# Altium PCB DoorController_DM-045.PcbDoc
Units mm, origin at the board's own origin, x right, y up, seen from the top; angles counter-clockwise.
Board outline 101.5 x 68.5 mm, 2 copper layers (Top Layer, Bottom Layer); 80 components, 62 nets, 270 pads, 53 vias.
Unrouted connection lines stored in the file: 54.
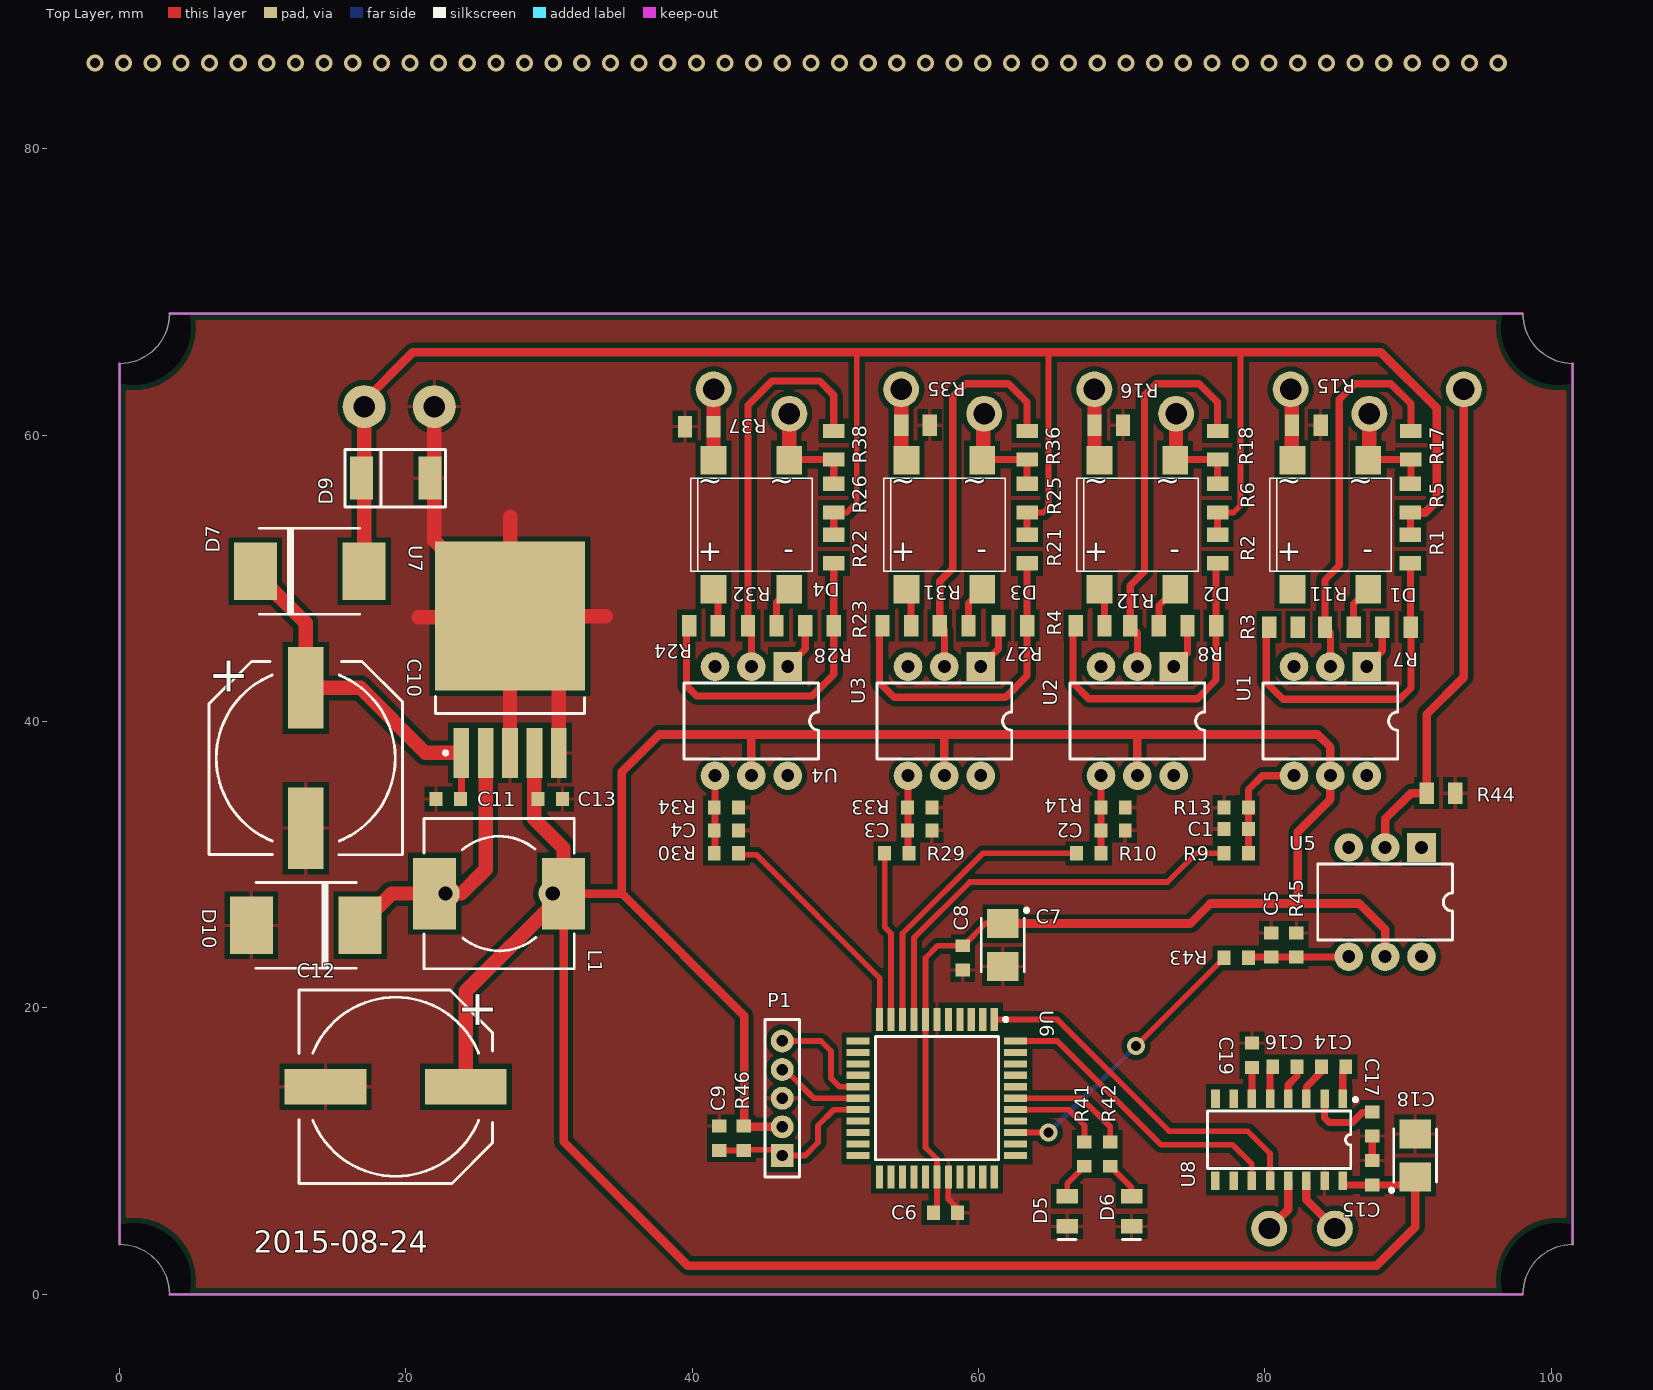
[diagram p0: Top Layer view]
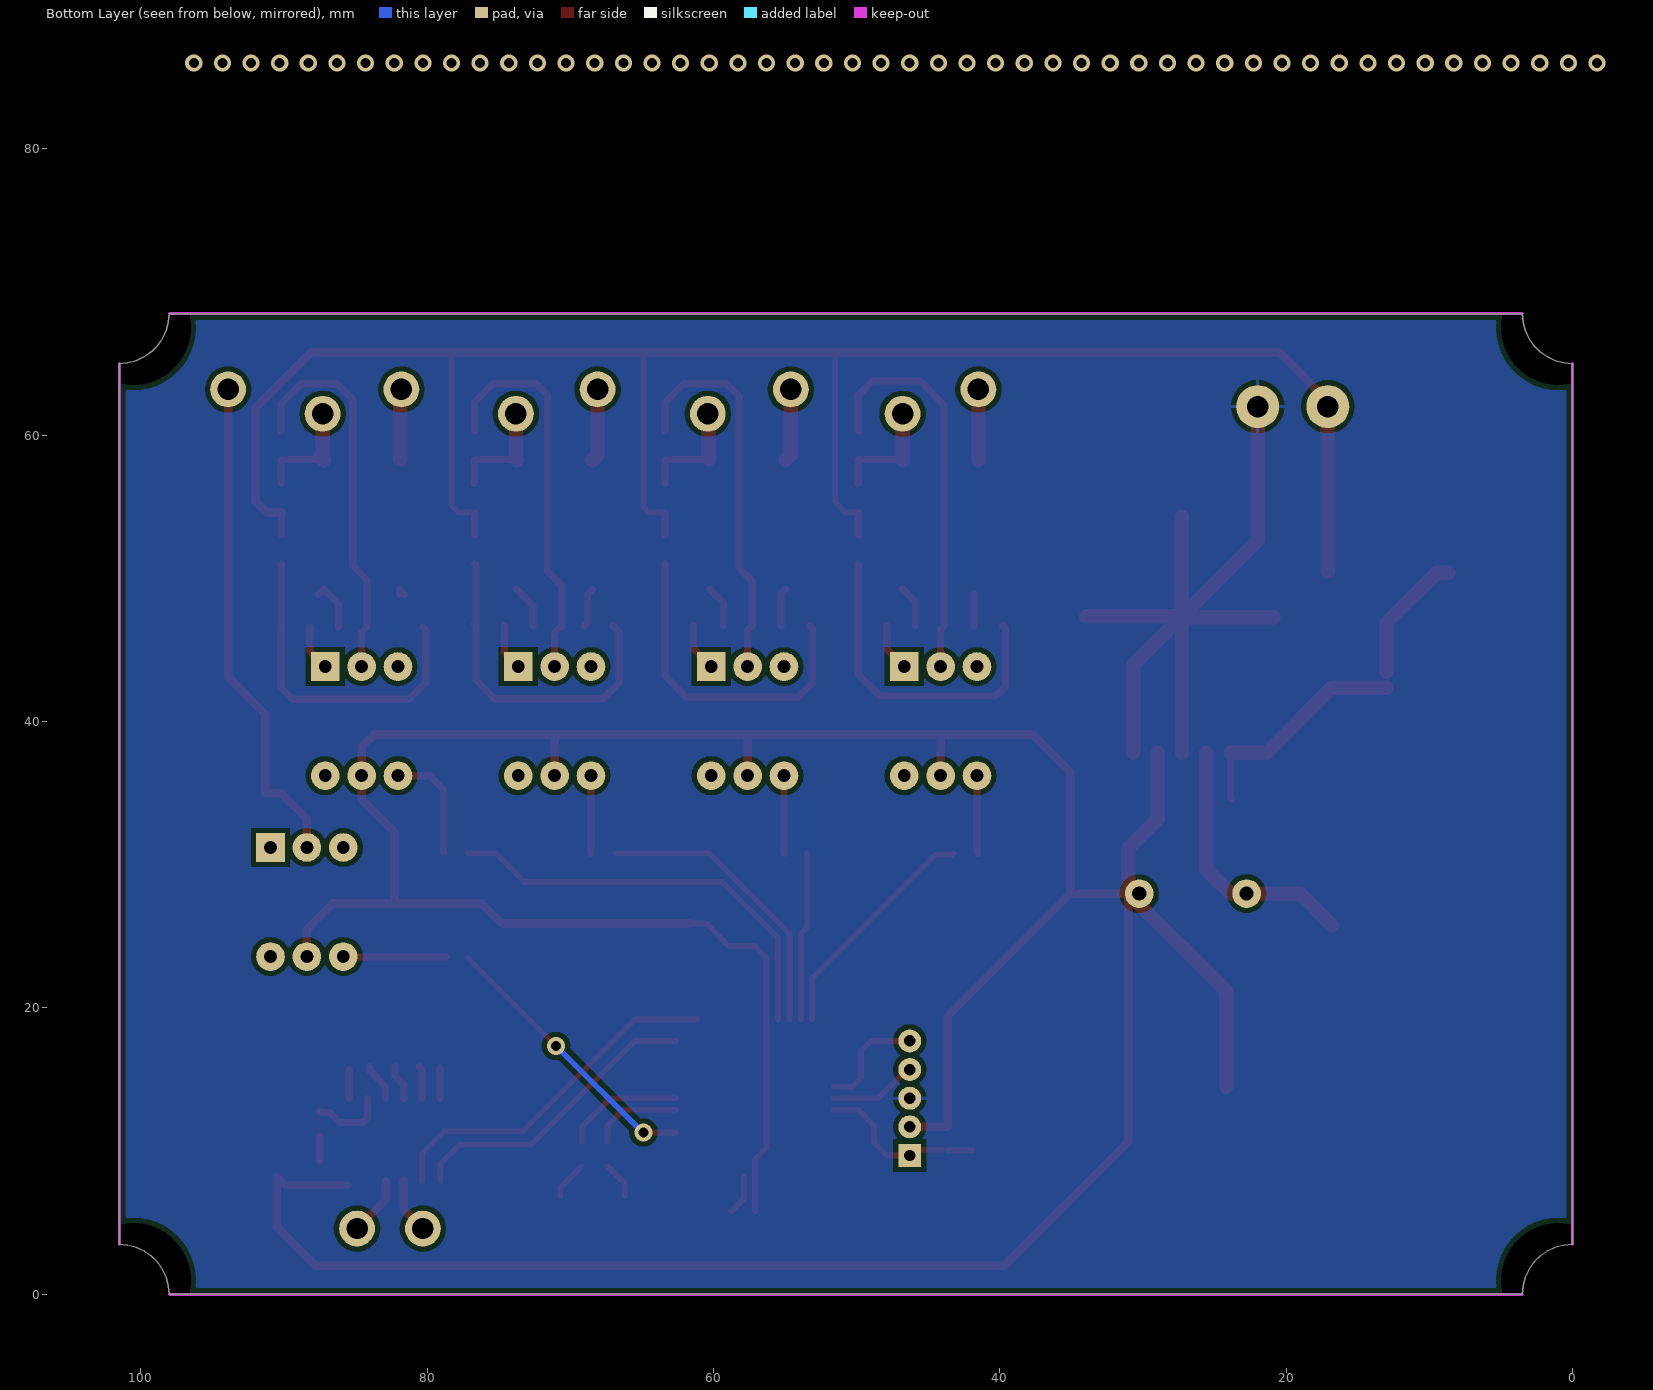
[diagram p1: Bottom Layer view, seen from below]
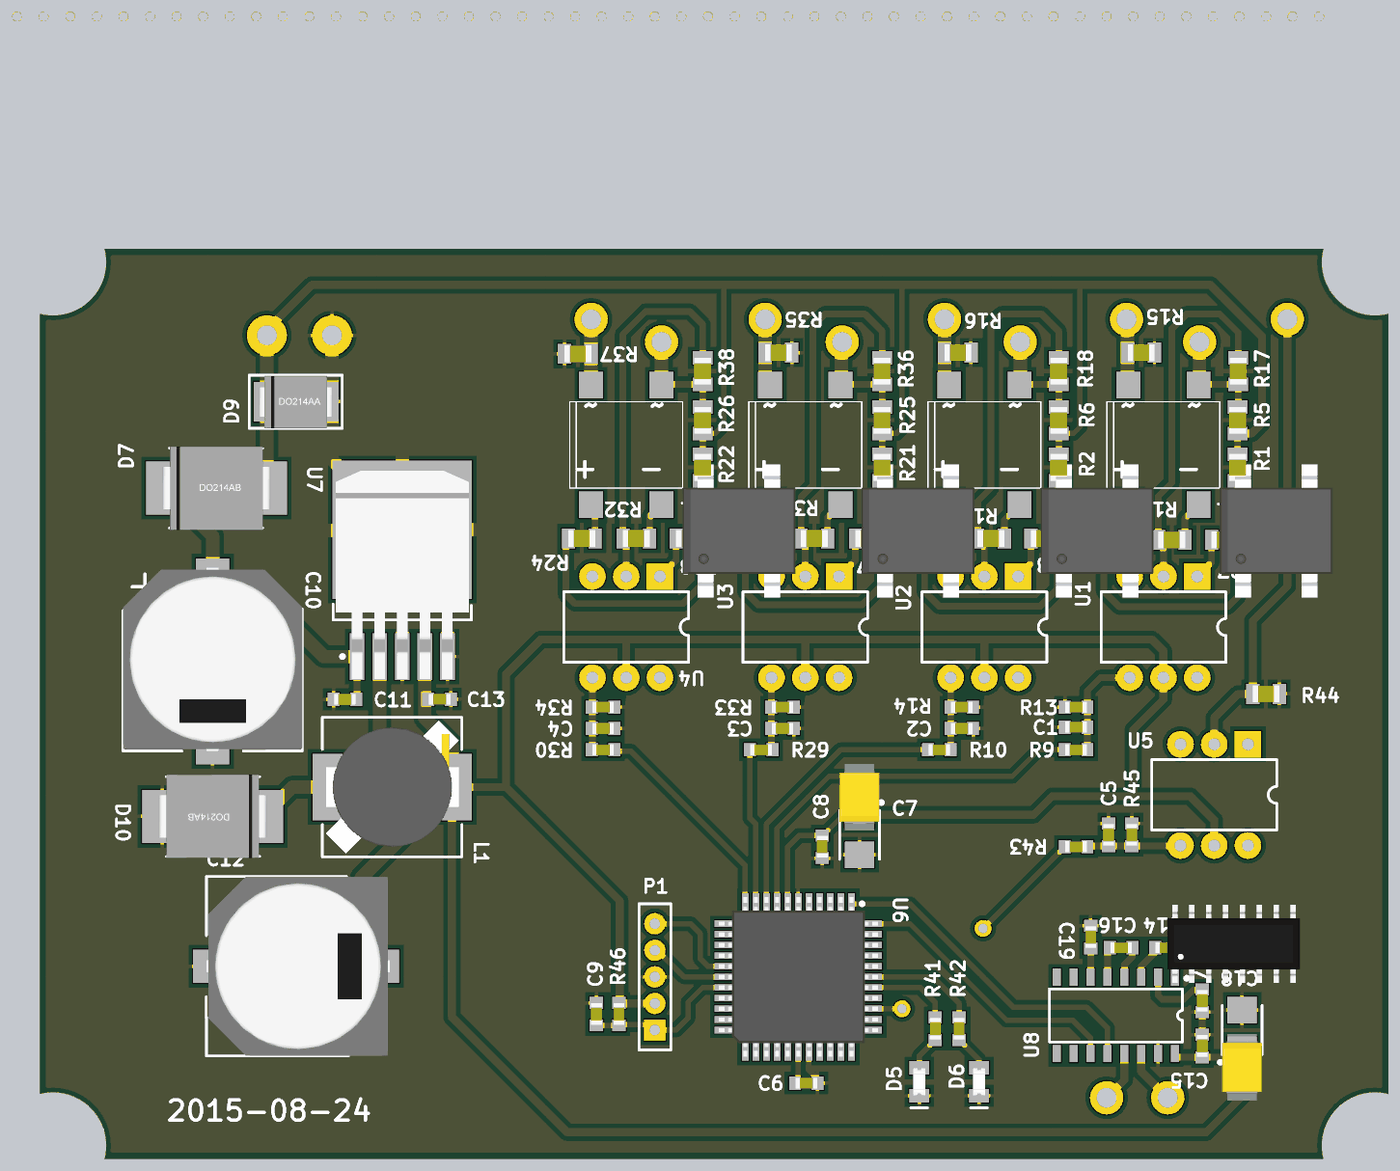
[diagram p2: 3D render of the assembled board from above, using the file's embedded part models]

## Layer stack, top to bottom
Top Layer: signal copper 0.0356
Dielectric: dielectric 0.32, FR-4, Dk 4.8
Bottom Layer: signal copper 0.0356

## Board outline
98.018,0.001 98.071,0.609 98.229,1.198 98.487,1.751 98.837,2.251 99.268,2.682 99.768,3.032 100.321,3.29 100.91,3.448 101.518,3.501 101.518,65.001 100.91,65.054 100.321,65.212 99.768,65.47 99.268,65.82 98.837,66.251 98.487,66.751 98.229,67.304 98.071,67.893 98.018,68.501 3.518,68.501 3.465,67.893 3.307,67.304 3.049,66.751 2.699,66.251 2.268,65.82 1.768,65.47 1.215,65.212 0.626,65.054 0.018,65.001 0.018,3.501 0.626,3.448 1.215,3.29 1.768,3.032 2.268,2.682 2.699,2.251 3.049,1.751 3.307,1.198 3.465,0.609 3.518,0.001

## Design rules (kind name [scope] priority, off if disabled: settings)
Clearance [All] p1: gap=0.35
PolygonConnect [All] p1: connectstyle=Relief reliefconductorwidth=0.254 reliefentries=4 polygonreliefangle="90 Angle"
RoutingVias [All] p1: holewidth=0.6 width=0.8 viastyle="Through Hole" minholewidth=0.6 minwidth=1 maxholewidth=0.711 maxwidth=1.5
SilkscreenOverComponentPads [All] p1: minsilkscreentomaskgap=0.254
SolderMaskExpansion [All] p1: expansion=0.102
TestPointUsage [All] p1: valid=0 allowmultiple=FALSE
Testpoint [All] p1: side=15 testpointundercomponent=TRUE minsize=1.016 maxsize=2.54 preferedsize=1.524 minholesize=0 maxholesize=1.016 preferedholesize=0.813 testpointgrid=0.025 style=1023 order=0123456789
Width [All] p1: maxlimit=1.5 minlimit=0.3 preferedwidth=0.4
23 further rules are at their usual default settings.

## Classes and differential pairs
component class USART: C14 C15 C16 C17 C18 C19 U8
component class POWER: C10 C11 C12 C13 D7 D9 D10 L1 U7
component class Main: C6 C7 C8 C9 P1 R46 U6
component class IO: C1 C2 C3 C4 C5 D1 D2 D3 D4 D5 D6 R1 R2 R3 R4 R5 R6 R7 R8 R9 R10 R11 R12 R13 R14 R15 R16 R17 R18 R21 R22 R23 R24 R25 R26 R27 R28 R29 R30 R31 R32 R33 R34 R35 R36 R37 R38 R41 R42 R43 R44 R45 U1 U2 U3 U4 U5

## Components (designator, comment, footprint, x,y, rotation, side; value= is the part's Value field where it differs from the comment)
C1 "Cap" 3-0603_L 78,32.5 r180 top
C2 "Cap" 3-0603_L 69.4,32.4 r0 top
C3 "Cap" 3-0603_L 55.9,32.4 r0 top
C4 "Cap" 3-0603_L 42.4,32.4 r0 top
C5 "Cap" 3-0603_L 80.45,24.4 r90 top
C6 "Cap" 3-0603_L 57.7,5.7 r0 top
C7 "CAP-Tantal" 3528 61.7,24.4 r270 top
C8 "Cap" 3-0603_L 58.9,23.5 r270 top
C9 "Cap" 3-0603_L 41.9,10.9 r90 top
C10 "Cap Pol1" "CAP Size H13= 12.5x13.8mm" 13.017,37.458 r0 top
C11 "Cap" 3-0603_L 22.969,34.594 r0 top
C12 "Cap Pol1" "CAP Size H13= 12.5x13.8mm" 19.3,14.5 r270 top
C13 "Cap" 3-0603_L 30.1,34.6 r180 top
C14 "Cap" 3-0603_L 84.8,15.9 r180 top
C15 "Cap" 3-0603_L 87.5,8.5 r270 top
C16 "Cap" 3-0603_L 81.4,15.9 r180 top
C17 "Cap" 3-0603_L 87.5,11.9 r90 top
C18 "CAP-Tantal" 3528 90.5,9.7 r90 top
C19 "Cap" 3-0603_L 79.1,16.7 r270 top
D1 "DI1010S" DF-S 84.579,53.751 r180 top
D2 "DI1010S" DF-S 71.1,53.751 r180 top
D3 "DI1010S" DF-S 57.621,53.751 r180 top
D4 "DI1010S" DF-S 44.142,53.751 r180 top
D5 "LED Kırmızı" "6-0805 - LED" 66.2,5.8 r270 top
D6 "LED Yesil" "6-0805 - LED" 70.7,5.8 r270 top
D7 "MBRS340T3G" "CASE 403-03 ISSUE E" 13.3,50.5 r180 top
D9 "TVS SMAJ48CA" "DO214 AA" 19.3,57 r180 top
D10 "MBRS340T3G" "CASE 403-03 ISSUE E" 13.017,25.774 r0 top
L1 "Inductor" EB-221M18G01 26.525,27.99 r90 top
P1 "Header 2mm 5pin" "Header 2mm 5Pin" 46.3,9.7 r90 top
R1 "Res1" 6-0805_M 90.167,52.051 r90 top
R2 "Res1" 6-0805_M 76.7,52.051 r90 top
R3 "Res1" 6-0805_M 81.3,46.6 r0 top
R4 "Res1" 6-0805_M 67.8,46.7 r0 top
R5 "Res1" 6-0805_M 90.167,55.607 r270 top
R6 "Res1" 6-0805_M 76.7,55.607 r270 top
R7 "Res1" 6-0805_M 89.2,46.6 r180 top
R8 "Res1" 6-0805_M 75.6,46.7 r180 top
R9 "Res1" 3-0603_L 78,30.8 r180 top
R10 "Res1" 3-0603_L 67.7,30.8 r180 top
R11 "Res1" 6-0805_M 85.2,46.6 r0 top
R12 "Res1" 6-0805_M 71.6,46.7 r0 top
R13 "Res1" 3-0603_L 78,34 r0 top
R14 "Res1" 3-0603_L 69.4,34 r180 top
R15 "Res1" 6-0805_M 82.9,60.7 r180 top
R16 "Res1" 6-0805_M 69.1,60.7 r180 top
R17 "Res1" 6-0805_M 90.2,59.3 r270 top
R18 "Res1" 6-0805_M 76.7,59.3 r270 top
R21 "Res1" 6-0805_M 63.4,52.051 r90 top
R22 "Res1" 6-0805_M 49.9,52.051 r90 top
R23 "Res1" 6-0805_M 54.3,46.7 r0 top
R24 "Res1" 6-0805_M 40.8,46.7 r0 top
R25 "Res1" 6-0805_M 63.4,55.607 r270 top
R26 "Res1" 6-0805_M 49.9,55.607 r270 top
R27 "Res1" 6-0805_M 62.4,46.7 r180 top
R28 "Res1" 6-0805_M 48.9,46.7 r180 top
R29 "Res1" 3-0603_L 54.3,30.8 r180 top
R30 "Res1" 3-0603_L 42.4,30.8 r0 top
R31 "Res1" 6-0805_M 58.3,46.7 r0 top
R32 "Res1" 6-0805_M 44.9,46.7 r0 top
R33 "Res1" 3-0603_L 55.9,34 r180 top
R34 "Res1" 3-0603_L 42.4,34 r180 top
R35 "Res1" 6-0805_M 55.6,60.7 r180 top
R36 "Res1" 6-0805_M 63.4,59.3 r270 top
R37 "Res1" 6-0805_M 40.5,60.6 r0 top
R38 "Res1" 6-0805_M 49.9,59.3 r270 top
R41 "Res1" 3-0603_L 67.4,9.8 r90 top
R42 "Res1" 3-0603_L 69.2,9.8 r90 top
R43 "Res1" 3-0603_L 78,23.5 r180 top
R44 "Res1" 6-0805_M 92.3,35 r180 top
R45 "Res1" 3-0603_L 82.2,24.4 r270 top
R46 "Res1" 3-0603_L 43.6,10.9 r90 top
U1 "4N25" DIP-6 84.579,40.035 r180 top
U2 "4N25" DIP-6 71.1,40.035 r180 top
U3 "4N25" DIP-6 57.621,40.035 r180 top
U4 "4N25" DIP-6 44.142,40.035 r180 top
U5 "4N25" DIP-6 88.4,27.4 r180 top
U6 "PIC16F887" TQFP-44 57.1,13.7 r270 top
U7 "LM2576S-5.0" TS5B_M 27.287,43.865 r90 top
U8 "MAX232ID" "SOIC16 - big" 81,10.8 r180 top

## Footprints (in the part's own frame and the unit in brackets; to place one, negate y for a bottom-side part, rotate by r counter-clockwise, add the part's x,y. Pads: shape width x height; smd on the part's side, far side on the other; paste and mask are expansions set on the pad)
3-0603_L [mm] "Chip Resistor; Body 1.6 x 0.9 mm (LxW typ)"
  rect 0.9x1 smd: 1(-0.85,0) 2(0.85,0)
  body extent -0.81,-0.41 0.81,0.41, height 0.46
"6-0805 - LED" [mm] "Chip LED"
  rect 1x1.5 smd: 1(-1.05,0) 2(1.05,0)
  silkscreen extent 1.96,-0.63 1.96,0.62, body extent -1.03,-0.45 1.03,0.46, height 0.85
6-0805_M [mm] "Chip Resistor; Body 2 x 1.2 mm (LxW typ)"
  rect 1x1.5 smd: 1(-1,0) 2(1,0)
  body extent -1.01,-0.63 1.01,0.64, height 0.61
3528 [mm] "Capacitor, SM Tantalum; Body 3.5 x 2.8 mm (LxW typ)"
  rect 2x2.2 smd: 1(-1.5,0) 2(1.5,0)
  silkscreen extent -2.55,-1.5 1.85,1.78, body extent -2.5,-1.5 2.5,1.5, height 2.11
"CAP Size H13= 12.5x13.8mm" [mm]
  rect 2.5x5.7 smd: 1(0,4.9) 2(0,-4.9)
  silkscreen extent -6.75,-6.76 6.75,6.75, body extent -6.75,-6.76 6.75,7.04, height 13.5
"CASE 403-03 ISSUE E" [mm] "CASE 403-03 ISSUE E"
  rect 3x4 smd: 1(-3.8,0) 2(3.8,0)
  silkscreen extent -3.48,-3 3.53,3, body extent -4.06,-3.14 4.06,3.16, height 2.67
DF-S [mm]
  rect 1.8x2 smd: 1(-2.65,4.5) 2(-2.65,-4.5) 3(2.65,4.5) 4(2.65,-4.5)
  silkscreen extent -4.25,-3.25 4.25,3.25, body extent -4.24,-5.02 4.26,4.98, height 3.63
DIP-6 [mm] "DIP; 6 Leads; Row Spacing 7.62 mm; Pitch 2.54 mm"
  rect 2x2 hole 0.9: 1(-2.54,-3.81)
  round 2 hole 0.9 unplated: 2(0,-3.81) 3(2.54,-3.81) 4(2.54,3.81) 5(0,3.81)
  round 2 hole 0.9: 6(-2.54,3.81)
  silkscreen extent -4.7,-2.65 4.7,2.65
"DO214 AA" [mm] "DO-214-AA/SMB; 2 C-Bend Leads; Body 5.6 x 3.9 mm, inc. leads (LxW)"
  rect 1.6x3 smd: 1(-2.4,0) 2(2.4,0)
  silkscreen extent -3.48,-2 3.53,2, body extent -2.76,-1.95 2.82,2, height 2.65
EB-221M18G01 [mm]
  rect 5x3 smd: 1(0,4.5) 2(0,-4.5)
  round 2 hole 1: 1(0,3.75) 2(0,-3.75)
  silkscreen extent -5.25,-5.25 5.25,5.25, body extent -5,-5.02 5,4.98, height 4.7
"Header 2mm 5Pin" [mm] "10 pin header"
  rect 1.6x1.6 hole 0.8: 1(0,0)
  round 1.6 hole 0.8: 2(2,0) 3(4,0) 4(6,0) 5(8,0)
  silkscreen extent -1.5,-1.2 9.5,1.2
"SOIC16 - big" [mm]
  rect 0.6x1.3 smd: 1(-4.445,-2.875) 2(-3.175,-2.875) 3(-1.905,-2.875) 4(-0.635,-2.875) 5(0.635,-2.875) 6(1.905,-2.875) 7(3.175,-2.875) 8(4.445,-2.875) 9(4.45,2.875) 10(3.175,2.875) 11(1.905,2.875) 12(0.635,2.875) 13(-0.635,2.875) 14(-1.905,2.875) 15(-3.175,2.875) 16(-4.445,2.875)
  silkscreen extent -5.45,-2.92 5,2, body extent -5,-2.95 4.98,2.95, height 1.45
TQFP-44 [mm]
  rect 1.6x0.5 smd: 1(-5.5,4) 2(-5.5,3.2) 3(-5.5,2.4) 4(-5.5,1.6) 5(-5.5,0.8) 6(-5.5,0) 7(-5.5,-0.8) 8(-5.5,-1.6) 9(-5.5,-2.4) 10(-5.5,-3.2) 11(-5.5,-4) 23(5.5,-4) 24(5.5,-3.2) 25(5.5,-2.4) 26(5.5,-1.6) 27(5.5,-0.8) 28(5.5,0) 29(5.5,0.8) 30(5.5,1.6) 31(5.5,2.4) 32(5.5,3.2) 33(5.5,4)
  rect 0.5x1.6 smd: 12(-4,-5.5) 13(-3.2,-5.5) 14(-2.4,-5.5) 15(-1.6,-5.5) 16(-0.8,-5.5) 17(0,-5.5) 18(0.8,-5.5) 19(1.6,-5.5) 20(2.4,-5.5) 21(3.2,-5.5) 22(4,-5.5) 34(4,5.5) 35(3.2,5.5) 36(2.4,5.5) 37(1.6,5.5) 38(0.8,5.5) 39(0,5.5) 40(-0.8,5.5) 41(-1.6,5.5) 42(-2.4,5.5) 43(-3.2,5.5) 44(-4,5.5)
  silkscreen extent -5.62,-4.3 4.3,4.93, body extent -6,-6 6,6, height 1.1
TS5B_M [mm] "D2-PAK, 6-Leads, Body 8.6x10.2mm, Pitch 1.7mm, Lead Span 14.1mm, IPC Low Density"
  rect 3.5x1.1 smd: 1(-6.05,3.4) 2(-6.05,1.7) 3(-6.05,0) 4(-6.05,-1.7) 5(-6.05,-3.4)
  rect 10.4x10.5 smd: 6(3.5,0)
  silkscreen extent -6.17,-5.2 -2.11,5.2, body extent -7.73,-5 7.94,5, height 4.78

## Part data
C1 C2 C3 C4 C5 C6 C8 C9 C11 C13 C14 C15 C16 C17 C19: "Capacitor"
C7 C18: "Tantamount Military, Surface Mount MIL-PRF-55365/8 Qualified Solid Tantalum Chip Capacitor: 6.8uF, 20% Tolerance, 6 WVDC @ +85°C, Surge = 8V"
C10 C12: "Polarized Capacitor (Radial)"
D1 D2 D3 D4: "Full Wave Diode Bridge"
D5 D6: library part LED, "Typical INFRARED GaAs LED"
D7 D10: "3 Amp Shotky Rectifier"
P1: "Header 2mm , 5-Pin"
R1 R2 R3 R4 R5 R6 R7 R8 R9 R10 R11 R12 R13 R14 R15 R16 R17 R18 R21 R22 R23 R24 R25 R26 R27 R28 R29 R30 R31 R32 R33 R34 R35 R36 R37 R38 R41 R42 R43 R44 R45 R46: "Resistor"
U6: "EPROM-Based 8-Bit CMOS Microcontroller"
U7: "SIMPLE SWITCHER; 3A Step-Down Voltage Regulator"
U8: "5V, Low-Power, up to 1Mbps, True RS-232 Transceiver Using Four 0.1µF External Capacitor"

## Free pads (board coordinates)
  round 3 hole 1.5: 1(17.1,62) 1(22,62)
  round 2.5 hole 1.5: 1(41.5,63.2) 1(46.8,61.5) 1(54.6,63.2) 1(60.4,61.5) 1(68.1,63.2) 1(73.8,61.5) 1(80.3,4.6) 1(81.8,63.2) 1(84.9,4.6) 1(87.3,61.5) 1(93.9,63.2)
  round 7 hole 8: 3(1,1) 3(1,67.5) 3(100.5,1) 3(100.5,67.5)

## Via types
v1: diameter 1.2, hole 0.7, Top Layer to Bottom Layer, tented both sides, 51 vias
v2: diameter 1.27, hole 0.711, Top Layer to Bottom Layer, 2 vias

## Nets (pads, with @x,y where several pads share a name; then routed paths per layer and width w, separated by ;. In a path a pad name is that pad's centre, name@x,y a point inside that pad or via, vN(x,y) a via of type N, cw(c..) or ccw(c..) an arc to the next point about the centre after c; other vN are vias at no path point)
"+24V INPUT": D7.1 D9.2 pad.1@17.1,62 R1.2 R2.2 R5.2 R6.2 R21.2 R22.2 R25.2 R26.2 | length 141.9
  Top Layer w0.4: R26.2 50.807,54.607 51.5,55.3 51.5,65.7 51.6,65.8 ; R25.2 64.507,54.607 64.9,55 64.9,65.8 ; R6.2 77.807,54.607 78.3,55.1 78.3,65.6
  Top Layer w0.5: R22.2 R26.2 ; R21.2 R25.2 ; R2.2 R6.2 ; R1.2 R5.2
  Top Layer w0.6: pad.1@17.1,62 17.1,62.4 20.5,65.8 51.6,65.8 64.9,65.8 88.1,65.8 92,61.9 92,55.4 91.207,54.607 R5.2
  Top Layer w1: D7.1 pad.1@17.1,62
GND: C1.2 C2.2 C3.2 C4.2 C5.2 C6.2 C7.2 C8.2 C9.2 C10.2 C11.1 C12.2 C13.1 C15.1 C17.1 C18.2 C19.1 D5.2 D6.2 D9.1 D10.1 P1.3 pad.1@22,62 R13.1 R14.1 R15.1 R16.1 R33.1 R34.1 R35.1 R37.1 R44.1 R45.1 U6.6 U6.29 U7.3 U7.5 U7.6 U8.15 | length 61.8
  Top Layer w0.4: U6.29 57.9,6.65 C6.2@58.75,5.8
  Top Layer w0.5: C15.1 C17.1
  Top Layer w1: 20.9,47.3 27.222,47.3 U7.6 ; pad.1@22,62 22,52.652 U7.6 ; U7.3 U7.6 ; 27.3,54.3 27.3,47.378 U7.6 ; U7.5 30.687,43.965 U7.6 ; 33.965,47.365 U7.6
  other v1: -1.7,86 -1.7,86 0.3,86 2.3,86 4.3,86 6.3,86 8.3,86 10.3,86 12.3,86 14.3,86 16.3,86 18.3,86 20.3,86 22.3,86 24.3,86 26.3,86 28.3,86 30.3,86 32.3,86 34.3,86 36.3,86 38.3,86 40.3,86 42.3,86 44.3,86 46.3,86 48.3,86 50.3,86 52.3,86 54.3,86 56.3,86 58.3,86 60.3,86 62.3,86 64.3,86 66.3,86 68.3,86 70.3,86 72.3,86 74.3,86 76.3,86 78.3,86 80.3,86 82.3,86 84.3,86 86.3,86 88.3,86 90.3,86 92.3,86 94.3,86 96.3,86
NetC1_1: C1.1 R9.1 R13.2 U1.4 | length 9.5
  Top Layer w0.5: R9.1@78.85,30.9 78.85,35.25 79.825,36.225 U1.4 ; R13.2@78.85,34.1 78.861,34.089 C1.1@78.861,32.5
NetC2_1: C2.1 R10.1 R14.2 U2.4 | length 5.4
  Top Layer w0.5: R10.1 68.56,30.81 68.56,32.4 U2.4
NetC3_1: C3.1 R29.1 R33.2 U3.4 | length 5.4
  Top Layer w0.5: R29.1@55.05,30.8 55.081,30.831 55.081,32.4 U3.4
NetC4_1: C4.1 R30.1 R34.2 U4.4 | length 5.4
  Top Layer w0.5: R30.1 41.602,30.852 41.602,32.4 U4.4
NetC5_1: C5.1 R43.1 R45.2 U5.4 | length 7.2
  Top Layer w0.5: R43.1@78.7,23.55 C5.1 R45.2 85.82,23.55 U5.4
NetC9_1: C9.1 P1.1 R46.1 U6.18 | length 11.4
  Top Layer w0.4: C9.1 R46.1 ; R46.1@44.05,10.1 45.9,10.1 P1.1 47.9,9.7 48.8,10.6 48.8,11.8 49.9,12.9 U6.18
NetC10_1: C10.1 C11.2 D7.2 U7.1 | length 25.2
  Top Layer w0.5: C11.2 23.887,34.662 U7.1
  Top Layer w1: D7.2@8.7,50.4 9.5,50.4 13.017,46.883 C10.1@13.017,43.483 ; C10.1 16.842,42.358 21.385,37.815 U7.1
NetC14_1: C14.1 U8.1 | length 2
  Top Layer w0.5: U8.1 C14.1@85.445,15.695
NetC14_2: C14.2 U8.3 | length 2.7
  Top Layer w0.5: U8.3 82.905,14.505 84.05,15.65 C14.2@84.05,15.9
NetC16_1: C16.1 U8.4 | length 2.5
  Top Layer w0.5: U8.4 81.635,14.635 82.25,15.25 C16.1
NetC16_2: C16.2 U8.5 | length 2.3
  Top Layer w0.5: U8.5 80.365,15.715 C16.2
NetC17_2: C17.2 U8.2 | length 5.1
  Top Layer w0.5: U8.2 84.175,12.325 84.5,12 86.1,12 86.8,12.7 87.45,12.7 C17.2
NetC19_2: C19.2 U8.6 | length 2.2
  Top Layer w0.5: U8.6 C19.2@79.095,15.845
NetD1_1: D1.1 R11.2 | length 3.6
  Top Layer w0.5: R11.2 86.2,48.222 D1.1 D1.1@87.611,48.869
NetD1_2: D1.2 pad.1@87.3,61.5 R5.1 R17.2 | length 8.4
  Top Layer w0.5: D1.2@87.7,58.722 87.285,58.307 R17.2@90.167,58.307 ; R5.1@90.2,56.64 R17.2
  Top Layer w1: D1.2 87.3,58.322 pad.1@87.3,61.5
NetD1_3: D1.3 R3.2 | length 0.9
  Top Layer w0.5: D1.3@81.547,48.869 D1.3 D1.3@81.929,48.908
NetD1_4: D1.4 pad.1@81.8,63.2 R15.2 | length 5.1
  Top Layer w0.5: D1.4@81.873,58.307 D1.4 D1.4@82.023,58.345
  Top Layer w1: pad.1@81.8,63.2 81.873,63.127 D1.4@81.873,58.307
NetD2_1: D2.1 R12.2 | length 3
  Top Layer w0.5: R12.2 72.6,48.101 D2.1
NetD2_2: D2.2 pad.1@73.8,61.5 R6.1 R18.2 | length 7.9
  Top Layer w0.5: D2.2@73.806,58.307 R18.2@76.7,58.307 ; R6.1 R18.2
  Top Layer w1: D2.2 73.8,58.301 pad.1@73.8,61.5
NetD2_3: D2.3 R4.2 | length 2.8
  Top Layer w0.5: D2.3 68.81,48.891 68.81,46.89 R4.2@69,46.7
NetD2_4: D2.4 pad.1@68.1,63.2 R16.2 | length 7.3
  Top Layer w0.5: D2.4@68.1,58.601 R16.2@68.1,60.8
  Top Layer w1: pad.1@68.1,63.2 68.1,58.601 D2.4
NetD3_1: D3.1 R31.2 | length 3
  Top Layer w0.5: R31.2 59.3,48.28 D3.1
NetD3_2: D3.2 pad.1@60.4,61.5 R25.1 R36.2 | length 8
  Top Layer w0.5: D3.2@60.327,58.307 R36.2@63.4,58.307 ; R25.1 R36.2
  Top Layer w1: D3.2@60.327,58.307 60.327,61.427 pad.1@60.4,61.5
NetD3_3: D3.3 R23.2 | length 2.7
  Top Layer w0.5: D3.3 55.3,48.922 R23.2
NetD3_4: D3.4 pad.1@54.6,63.2 R35.2 | length 5.1
  Top Layer w1: pad.1@54.6,63.2 54.6,58.622 D3.4
NetD4_1: D4.1 R32.2 | length 2.9
  Top Layer w0.5: R32.2 45.9,48.359 D4.1
NetD4_2: D4.2 pad.1@46.8,61.5 R26.1 R38.2 | length 8
  Top Layer w0.5: pad.1@46.792,61.492 pad.1@46.8,61.5 ; D4.2@46.848,58.307 R38.2@49.9,58.307 ; R26.1 R38.2
  Top Layer w1: D4.2 pad.1@46.792,61.492
NetD4_3: D4.3 R24.2 | length 2.2
  Top Layer w0.5: R24.2 D4.3@41.8,48.943
NetD4_4: D4.4 pad.1@41.5,63.2 R37.2 | length 5
  Top Layer w1: D4.4 41.5,58.259 R37.2 pad.1@41.5,63.2
NetD5_1: D5.1 R41.1 | length 2.6
  Top Layer w0.4: D5.1 66.2,7.75 R41.1
NetD6_1: D6.1 R42.1 | length 2.7
  Top Layer w0.4: R42.1 70.7,7.45 D6.1
NetD10_2: D10.2 L1.1 U7.2 | length 18.5
  Top Layer w1: D10.2 19.033,27.99 22.025,27.99 22.775,27.99 23.89,27.99 25.587,29.687 U7.2
NetP1_4: P1.4 U6.17 | length 6.1
  Top Layer w0.4: P1.4 46.5,15.7 48.5,13.7 U6.17
NetP1_5: P1.5 U6.16 | length 8.8
  Top Layer w0.4: 47.4,17.7 P1.5 49,17.7 49.7,17 49.7,15.1 50.3,14.5 U6.16
NetR1_1: R1.1 R3.1 R7.1 | length 25.1
  Top Layer w0.5: 80.2,42.636 81.277,41.559 ; R3.1 80.1,46.4 80.1,42.736 81.277,41.559 ; R7.1@90.167,46.6 R1.1 ; R7.1 90.2,42.354 89.405,41.559 81.277,41.559
NetR2_1: R2.1 R4.1 R8.1 | length 23.5
  Top Layer w0.5: R4.1@67,46.7 66.6,46.3 66.6,42.7 67.7,41.6 75.3,41.6 76.6,42.9 R8.1 ; R8.1@76.7,46.8 R8.1 ; R2.1 76.6,50.951 R8.1
NetR7_2: R7.2 U1.1 | length 3.2
  Top Layer w0.5: U1.1 88.2,44.926 R7.2
NetR8_2: R8.2 U2.1 | length 3.3
  Top Layer w0.5: U2.1 74.6,44.805 R8.2
NetR9_2: R9.2 U6.8 | length 29.8
  Top Layer w0.4: U6.8 55.5,24.9 59.4,28.8 73.2,28.8 75.2,30.8 R9.2
NetR10_2: R10.2 U6.9 | length 20.5
  Top Layer w0.4: U6.9 54.7,25.2 60.3,30.8 R10.2
NetR11_1: R11.1 R17.1 U1.2 | length 27.2
  Top Layer w0.5: U1.2 84.579,46.221 R11.1 84.2,49.9 85.2,50.9 85.2,62.5 86.3,63.6 88.8,63.6 90.2,62.2 R17.1
NetR12_1: R12.1 R18.1 U2.2 | length 27.5
  Top Layer w0.5: U2.2 71.1,46.2 R12.1 70.6,49.5 71.6,50.5 71.6,62.8 72.4,63.6 75.4,63.6 76.7,62.3 R18.1
NetR21_1: R21.1 R23.1 R27.1 | length 23.3
  Top Layer w0.5: R23.1 53.1,46.5 53.1,42.7 54.1,41.7 61.9,41.7 63.4,43.2 R21.1
NetR22_1: R22.1 R24.1 R28.1 | length 23.2
  Top Layer w0.5: R24.1 39.6,46.5 39.6,42.5 40.3,41.8 48.4,41.8 49.9,43.3 R28.1 R22.1
NetR27_2: R27.2 U3.1 | length 3.4
  Top Layer w0.5: U3.1 61.4,45.084 R27.2
NetR28_2: R28.2 U4.1 | length 3.4
  Top Layer w0.5: U4.1 47.9,45.063 R28.2
NetR29_2: R29.2 U6.10 | length 11.8
  Top Layer w0.4: R29.2 53.45,25.65 53.9,25.2 U6.10
NetR30_2: R30.2 U6.11 | length 16.4
  Top Layer w0.4: R30.2 43.35,30.7 44.5,30.7 53.1,22.1 U6.11
NetR31_1: R31.1 R36.1 U3.2 | length 28
  Top Layer w0.5: U3.2 57.621,46.379 R31.1 57.3,49.8 58.2,50.7 58.2,59 ; 58.2,59.5 58.2,59 ; R36.1 63.4,62.3 62.1,63.6 59.1,63.6 58.2,62.7 58.2,59
NetR32_1: R32.1 R38.1 U4.2 | length 28
  Top Layer w0.5: U4.2 44.142,46.458 R32.1 43.9,62.1 45.6,63.8 48.9,63.8 49.9,62.8 R38.1
NetR41_2: R41.2 U6.38 | length 6.4
  Top Layer w0.4: U6.38 66.3,12.9 67.4,11.8 R41.2
NetR42_2: R42.2 U6.39 | length 8.5
  Top Layer w0.4: U6.39 67.2,13.7 69.2,11.7 R42.2
NetR43_2: R43.2 U6.36 | length 19.6
  Top Layer w0.4: U6.36 v2(64.9,11.3) ; v2(71,17.35) R43.2
  Bottom Layer w0.4: v2(64.9,11.3) 64.95,11.3 v2(71,17.35)
NetR44_2: pad.1@93.9,63.2 R44.2 U5.2 | length 34.9
  Top Layer w0.6: U5.2 88.4,33.2 90.2,35 R44.2 91.3,40.5 93.9,43.1 pad.1@93.9,63.2
NetU5_1: U5.1
NetU6_1: U6.1 U8.12 | length 25.1
  Top Layer w0.4: U6.1 65.5,19.2 73.3,11.4 78.8,11.4 80.365,9.835 U8.12
NetU6_44: U6.44 U8.11 | length 21.2
  Top Layer w0.4: U6.44 65.5,17.7 72.75,10.45 77.75,10.45 79.095,9.105 U8.11
NetU8_13: pad.1@80.3,4.6 U8.13 | length 3.9
  Top Layer w0.6: pad.1@80.3,4.6 81.635,5.935 U8.13
NetU8_14: pad.1@84.9,4.6 U8.14 | length 4.2
  Top Layer w0.6: U8.14 82.905,6.595 pad.1@84.9,4.6
VCC: C6.1 C7.1 C8.1 C12.1 C13.2 C15.2 C18.1 L1.2 P1.2 R46.2 U1.5 U2.5 U3.5 U4.5 U5.5 U6.7 U6.28 U7.4 U8.16 | length 278.1
  Top Layer w0.4: C6.1@57.05,5.8 57.1,5.85 U6.28 57.1,9.45 56.3,10.25 U6.7 56.3,23.5 57.15,24.35 C8.1 58.95,24.35 60.5,25.9 C7.1
  Top Layer w0.5: U8.16@85.5,7.65 C15.2 89.95,7.65 C18.1
  Top Layer w0.6: R46.2@43.65,11.7 P1.2 ; R46.2@43.65,11.75 43.65,19.44 35.1,27.99 ; U4.5 44.142,39.042 ; U3.5 57.621,39.021 57.7,39.1 ; C7.1 74.8,25.9 76.2,27.3 82.4,27.3 ; U2.5 71.1,39 71,39.1 ; 82.3,28.7 82.3,29.1 ; U5.5 88.4,25.5 86.6,27.3 82.4,27.3 ; C18.1 90.5,4.7 87.8,2 39.7,2 31.025,10.675 31.025,27.99 35.1,27.99 ; 35.1,27.99 35.1,36.5 37.7,39.1 57.7,39.1 ; 57.7,39.1 71,39.1 ; 71,39.1 83.7,39.1 84.579,38.221 U1.5 84.579,34.579 82.3,32.3 82.3,29.1 ; 82.3,29.1 82.3,27.4 82.4,27.3
  Top Layer w1: C12.1 24.2,21.165 L1.2@30.65,27.615 ; U7.4 28.987,33.2 31.025,31.162 31.025,27.99 L1.2@31.135,28.1
pads on no net: U1.3 U1.6 U2.3 U2.6 U3.3 U3.6 U4.3 U4.6 U5.3 U5.6 U6.2 U6.3 U6.4 U6.5 U6.12 U6.13 U6.14 U6.15 U6.19 U6.20 U6.21 U6.22 U6.23 U6.24 U6.25 U6.26 U6.27 U6.30 U6.31 U6.32 U6.33 U6.34 U6.35 U6.37 U6.40 U6.41 U6.42 U6.43 U8.7 U8.8 U8.9 U8.10

## Polygon pours and split planes (outlines as drawn)
GND on Top Layer "Top Layer-No Net" (solid): 0,0 101.5,0 101.5,68.5 0,68.5
GND on Bottom Layer "Top Layer-No Net" (solid): 0,0 101.5,0 101.5,68.5 0,68.5

## Keep-outs
Keep-Out Layer:
  lines w0.2: 0,3.5 0,65 ; 3.5,0 98,0 ; 3.5,68.5 98,68.5 ; 101.5,3.5 101.5,65

## Silkscreen, mask and mechanical layers (free items; w line width, h text height)
Top Overlay:
  text "2015-08-24" at 9.4,2.9 h1.52

## Text inside footprints (layer, text, board x,y; h text height)
C10: Top Overlay "+" at 6.212,42.098 h2.5
C12: Top Overlay "+" at 23.94,21.305 h2.5 r270
D1: Top Overlay "~" at 82.579,57.401 h1.52 r180; Top Overlay "~" at 87.579,57.401 h1.52 r180; Top Overlay "-" at 87.579,52.501 h1.52 r180; Top Overlay "+" at 82.579,52.501 h1.52 r180
D2: Top Overlay "~" at 69.1,57.401 h1.52 r180; Top Overlay "~" at 74.1,57.401 h1.52 r180; Top Overlay "-" at 74.1,52.501 h1.52 r180; Top Overlay "+" at 69.1,52.501 h1.52 r180
D3: Top Overlay "~" at 55.621,57.401 h1.52 r180; Top Overlay "~" at 60.621,57.401 h1.52 r180; Top Overlay "-" at 60.621,52.501 h1.52 r180; Top Overlay "+" at 55.621,52.501 h1.52 r180
D4: Top Overlay "~" at 42.142,57.401 h1.52 r180; Top Overlay "~" at 47.142,57.401 h1.52 r180; Top Overlay "-" at 47.142,52.501 h1.52 r180; Top Overlay "+" at 42.142,52.501 h1.52 r180